# Altium PCB satFloat.PcbDoc
Units mil, origin at the board's own origin, x right, y up, seen from the top; angles counter-clockwise.
Board outline 2750 x 2255 mil, 4 copper layers (Top Layer, VCC, GND, Bottom Layer), stack 30.634 mil thick; 58 components, 45 nets, 251 pads, 54 vias.
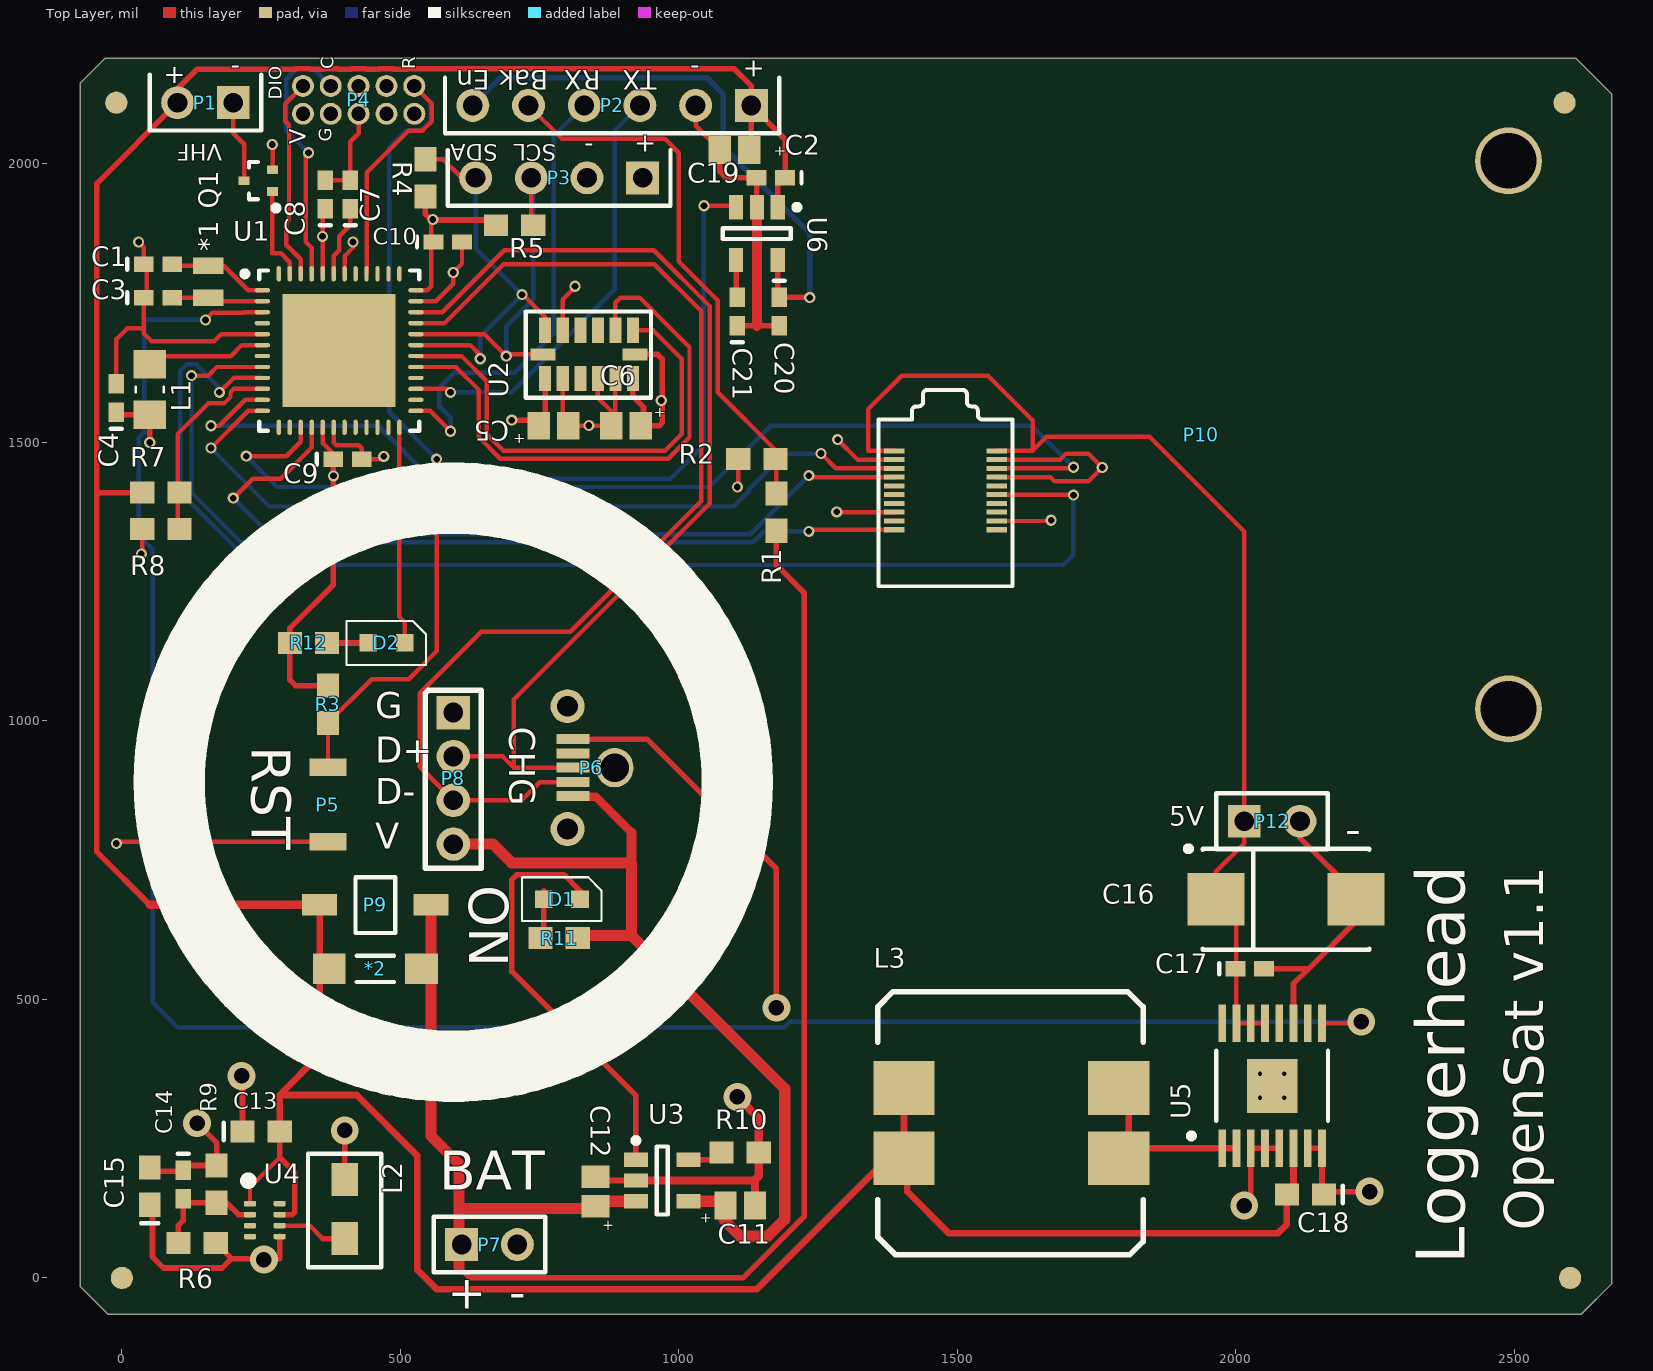
[diagram p0: Top Layer view]
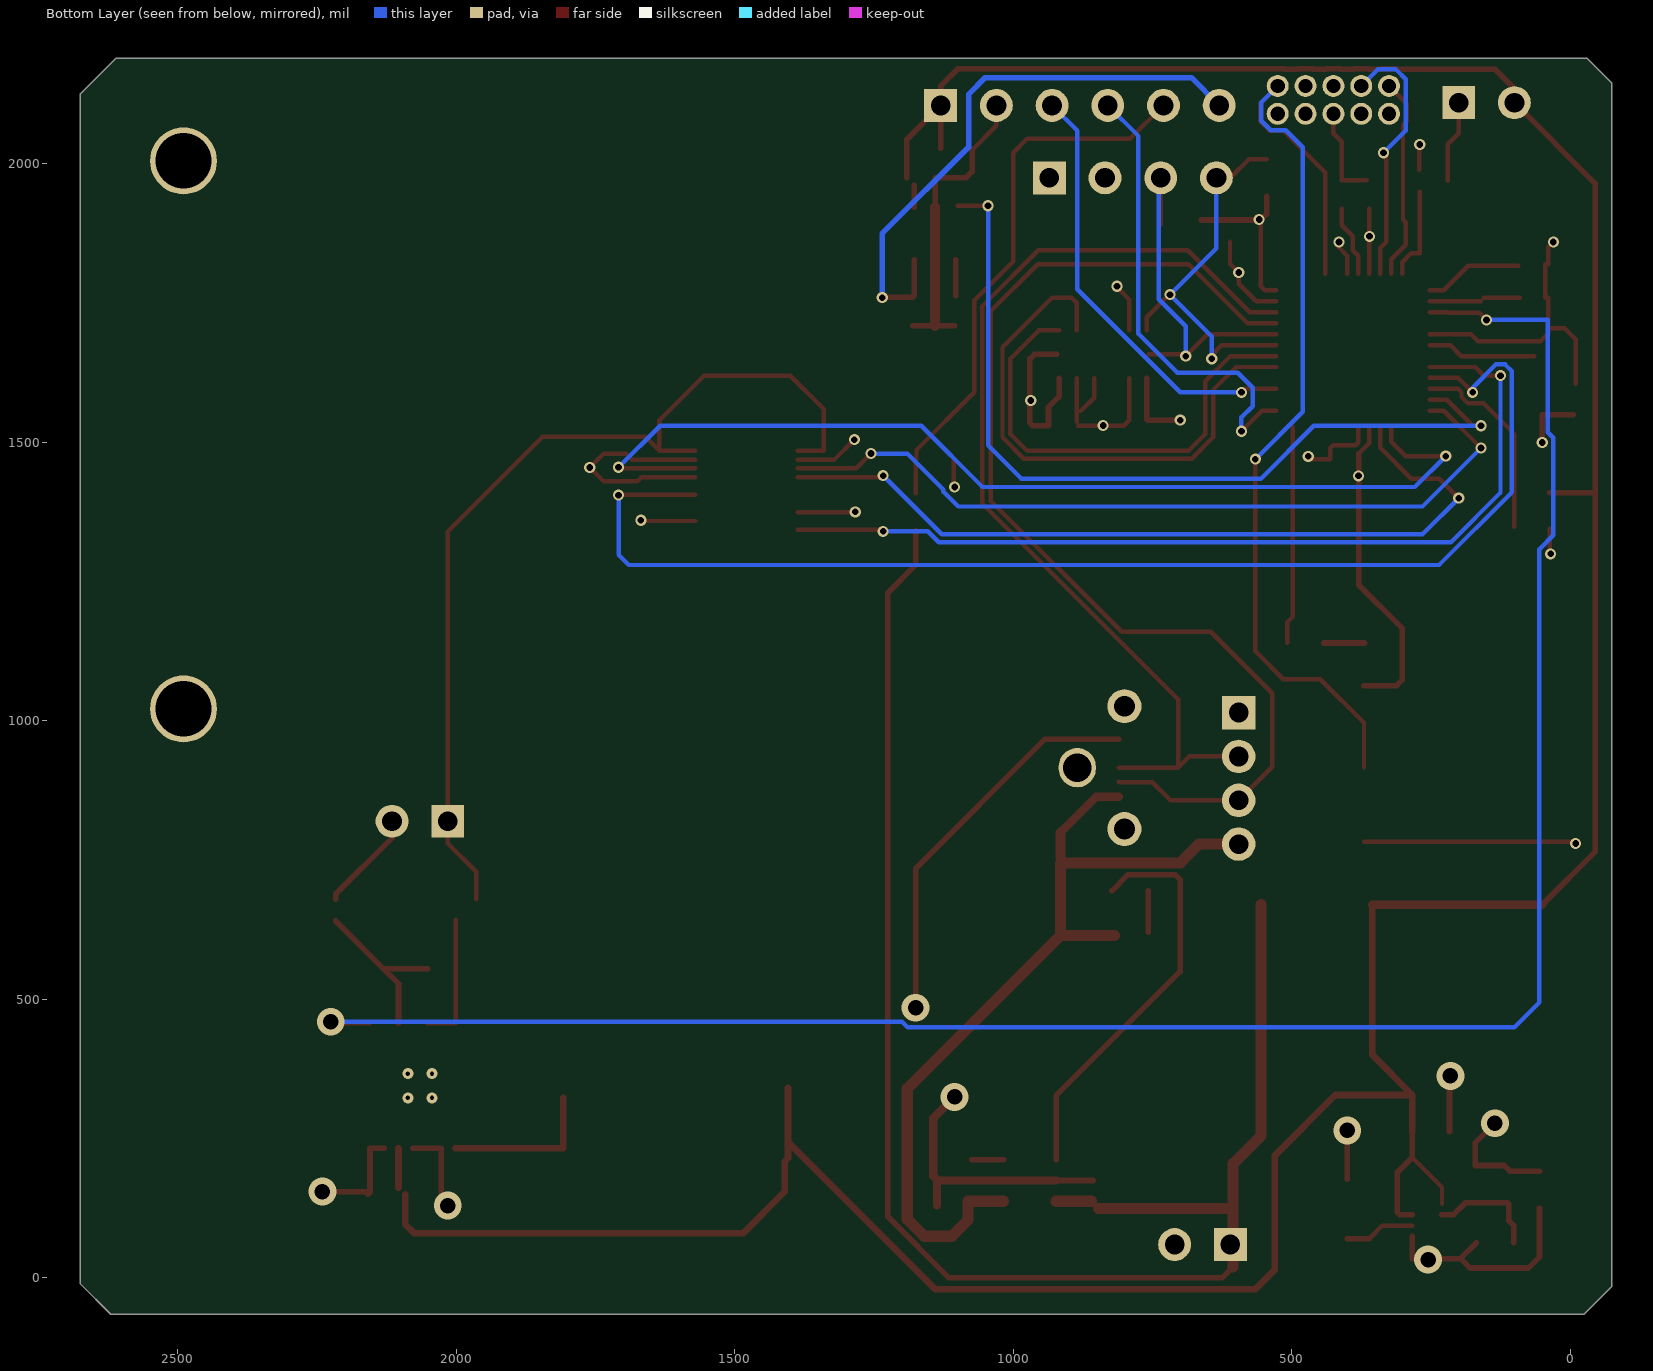
[diagram p1: Bottom Layer view, seen from below]
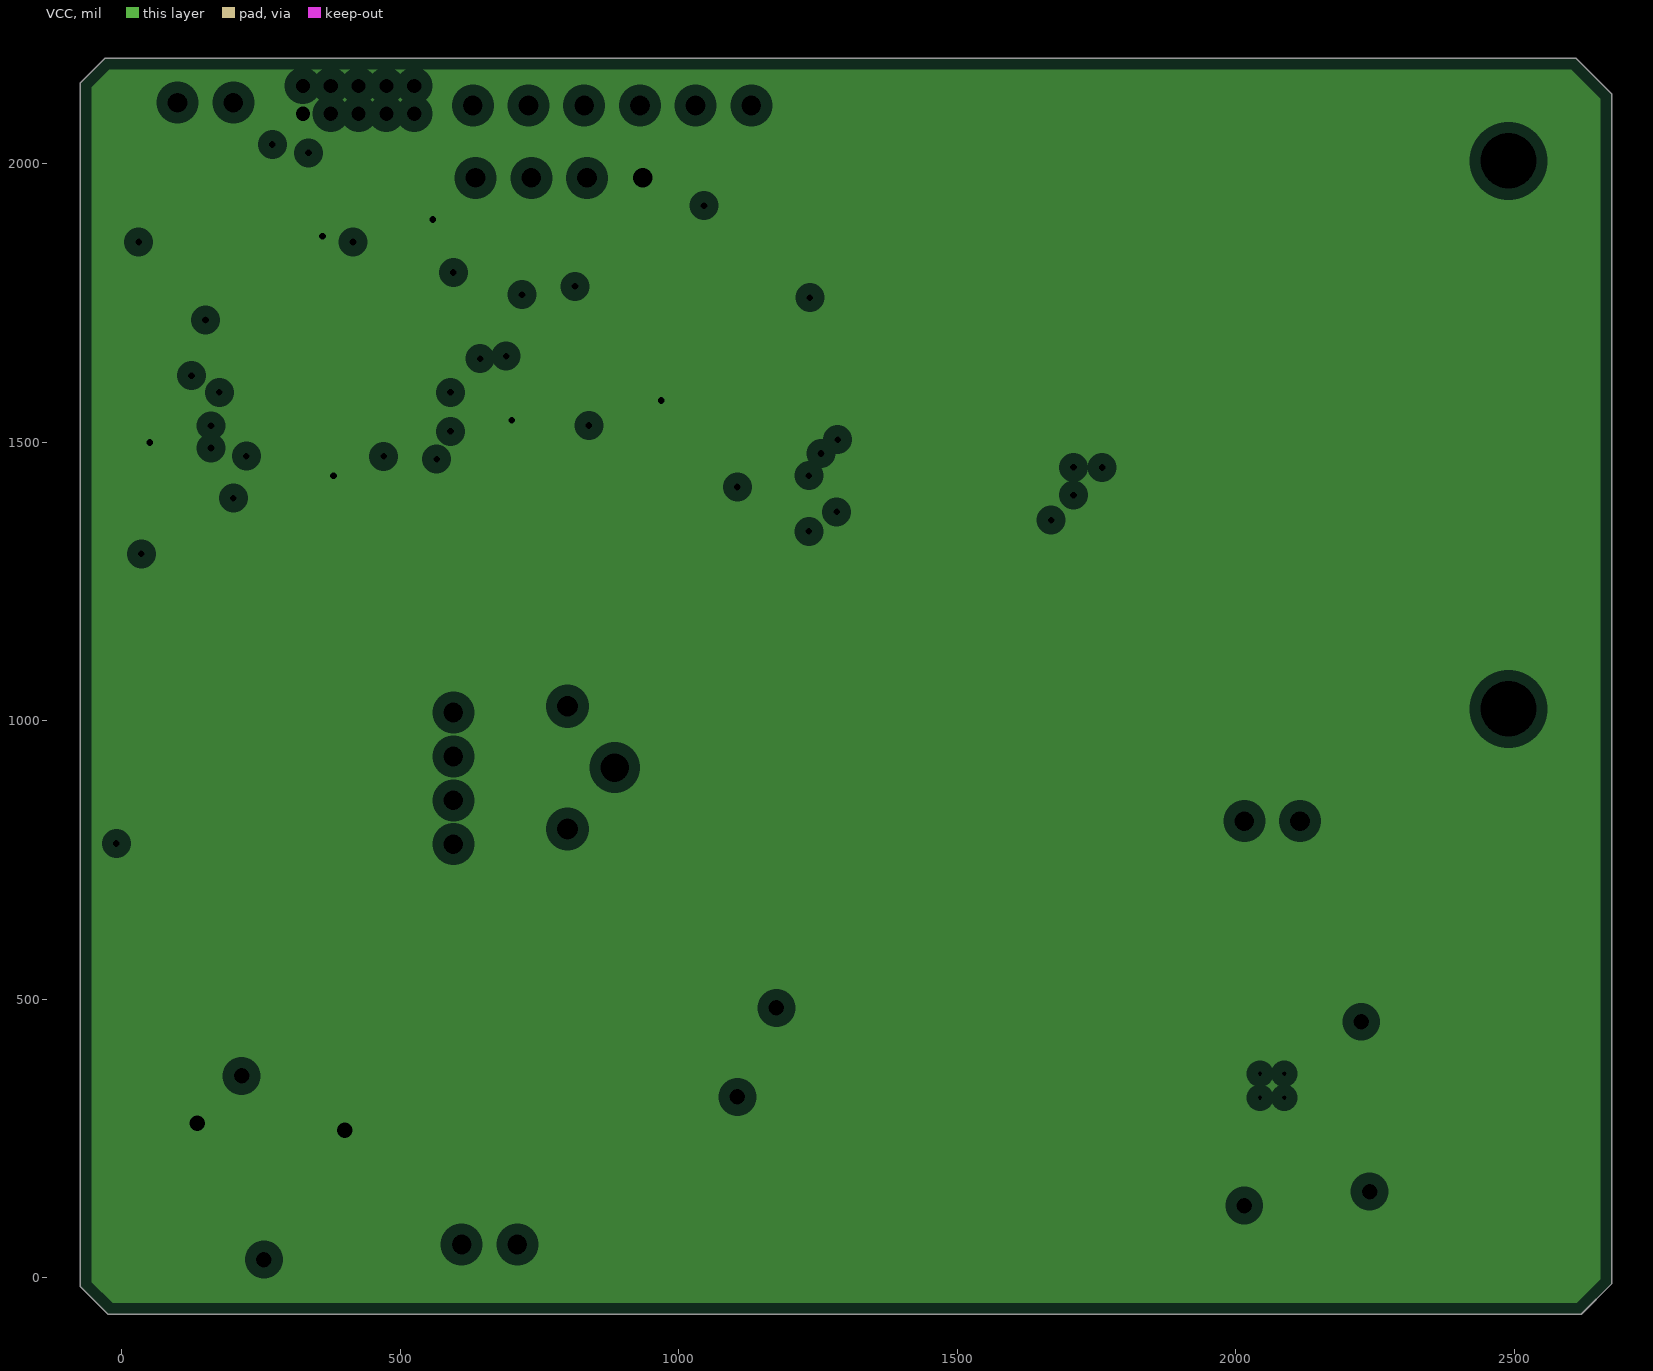
[diagram p2: VCC, clearances drawn from the general rule]
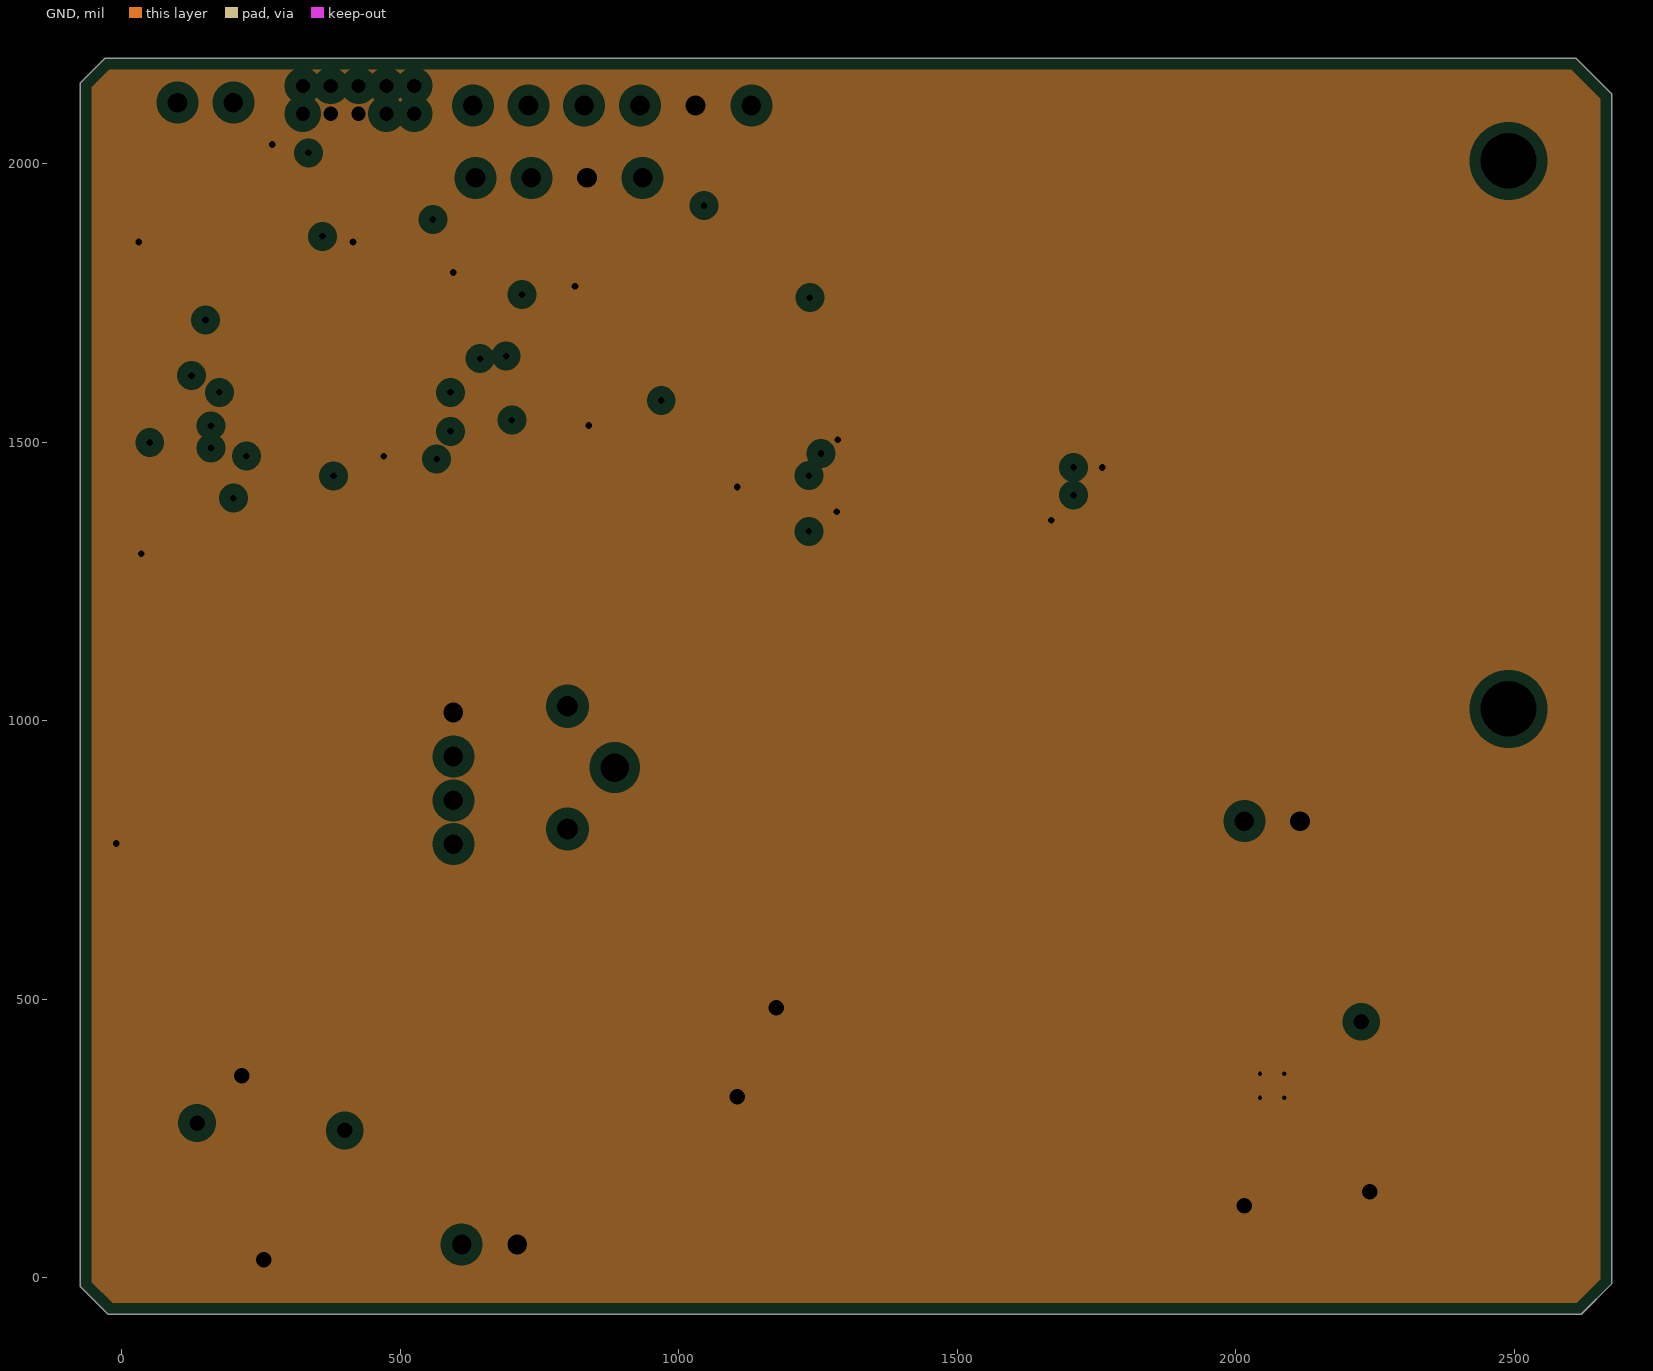
[diagram p3: GND, clearances drawn from the general rule]

## Layer stack, top to bottom
Top Solder: solder mask 0.4, Solder Resist, Dk 3.5
Top Layer: signal copper 1.4
Dielectric 1: core 10, FR-4, Dk 4.2
VCC: plane copper 1.417, net VCC
Dielectric 3: prepreg 5, Dk 4.2
GND: plane copper 1.417, net GND
Dielectric 2: core 10, Dk 4.2
Bottom Layer: signal copper 1.4
Bottom Solder: solder mask 0.4, Solder Resist, Dk 3.5

## Board outline
-75,-15 -75,2145 -30,2190 2610,2190 2675,2125 2675,-10 2620,-65 -25,-65

## Design rules (kind name [scope] priority, off if disabled: settings)
Clearance [All] p1: gap=6
PlaneClearance [All] p1: clearance=20
PlaneConnect [All] p1: planeconnectstyle=Relief reliefexpansion=20 reliefentries=4 reliefconductorwidth=10 reliefairgap=10
PolygonConnect [All] p1: connectstyle=Relief reliefconductorwidth=10 reliefentries=4 polygonreliefangle="90 Angle" airgapwidth=10
RoutingVias [All] p1: holewidth=20 width=50 viastyle="Through Hole" minholewidth=10 minwidth=20 maxholewidth=28 maxwidth=50
SolderMaskExpansion [All] p1: expansion=4
Width [All] p1: maxlimit=50 minlimit=6 preferedwidth=8
27 further rules are at their usual default settings.

## Classes and differential pairs
component class satFloat: *1 *2 C1 C2 C3 C4 C5 C6 C7 C8 C9 C10 C11 C12 C13 C14 C15 D1 D2 L1 L2 P1 P2 P3 P4 P5 P6 P7 P8 P9 Q1 R1 R2 R3 R4 R5 R6 R7 R8 R9 R10 R11 R12 U1 U2 U3 U4
component class iridium: C16 C17 C18 C19 C20 C21 L3 P10 P12 U5 U6

## Components (designator, comment, footprint, x,y, rotation, side; value= is the part's Value field where it differs from the comment)
*1 "XTAL_ABS06" XTAL-ABS06 155,1788.54 r90 top
*2 "Reed_MK24" "Reed MK24-B-3" 455,555 r180 top
C1 "22.5pF" 0402 65,1820 r0 top
C2 "1uF" Tant0805 1100,2025 r0 top
C3 "22.5pF" 0402 65,1760 r0 top
C4 "0.1uF" 0402 -10,1580 r90 top
C5 "1uF" Tant0805 775,1530 r180 top
C6 "1uF" Tant0805 905,1530 r0 top
C7 "0.1uF" 0402 410,1945 r90 top
C8 "0.1uF" 0402 365,1945 r90 top
C9 "0.1 uF" 0402 405,1470 r0 top
C10 "0.1 uF" 0402 585,1860 r0 top
C11 "1uF" Tant0805 1110,130 r180 top
C12 "1uF" Tant0805 850,155 r270 top
C13 "4.7uF" 0603 250,262.87 r0 top
C14 "82pF" 0402 110,167.87 r270 top
C15 "22uF" 0603 50,165 r90 top
C16 "T495X227K010ATE050" X 2090,680 r0 top
C17 "2.2uF" 0402 2025,555 r0 top
C18 "C0603" 0603 2125,150 r180 top
C19 "1.0uF" 0402 1165,1975 r180 top
C20 "1.0uF" 0402 1180,1735 r270 top
C21 "10nF" 0402 1105,1735 r90 top
D1 "LED_0603" Diode0603 790,680 r0 top
D2 "LED_0603" Diode0603 475,1140 r0 top
L1 "220Ohm" "0805 (M2125) Ferrite" 50,1595 r270 top
L2 "470nH" Inductor_470NH 400,70.59 r90 top
L3 "6.8uH" "Inductor - duplicate" 1790,215 r270 top
P1 "Header 2" HDR1X2 200,2110 r180 top
P2 "Header 6" HDR1X6 1130,2105 r180 top
P3 "Header 4" HDR1X4 935,1975 r180 top
P4 "Cortex Debug" Header_2x5_50mil 525,2090 r90 top
P5 "Tactile" Tactile-B3U-1000 370,850 r90 top
P6 "microUSB-vert" MICROUSB-VERT 810,865 r90 top
P7 "Battery" HDR1X2 610,60 r0 top
P8 "HDR_4x1_2mm" Hdr_4x1_2mm 595,1015 r180 top
P9 "DIP1" DIP1 555,670 r180 top
P10 "Iridiuim9603" Iridium9603 1480,1415 r270 top
P12 "UltraCap" HDR1X2 2015,820 r0 top
Q1 "DMN5L06TK-7" SOT-523 245,1970 r180 top
R1 "100l" 3-0603 1175,1375 r270 top
R2 "100k" 3-0603 1140,1470 r0 top
R3 "10K" 3-0603 370,1030 r270 top
R4 "4.7k" 3-0603 545,1975 r90 top
R5 "4.7k" 3-0603 705,1890 r180 top
R6 "150k" 3-0603 135,62.87 r0 top
R7 "100k" 3-0603 70,1410 r180 top
R8 "100k" 3-0603 70,1345 r0 top
R9 "680k" 3-0603 170,168.46 r270 top
R10 "2k" 3-0603 1110,225 r180 top
R11 "330X" 3-0603 785,610 r180 top
R12 "330X" 3-0603 335,1140 r0 top
U1 "ATSAMD21GA-MUT" QFN127P600-8N 390,1665 r0 top
U2 "ADXL343" ADXL345 760,1615 r90 top
U3 "MCP73831T-2DCI/OT" SOT-23-OT5_N 970,175 r0 top
U4 "TPS62822" TPS62822_SOP8 230,133.46 r0 top
U5 "TPS61032" TPS6103x 2065,345 r90 top
U6 "LP3985IM5-3.3" MF05A_N 1140,1875 r270 top

## Footprints (in the part's own frame and the unit in brackets; to place one, negate y for a bottom-side part, rotate by r counter-clockwise, add the part's x,y. Pads: shape width x height; smd on the part's side, far side on the other; paste and mask are expansions set on the pad)
3-0603 [mm] "Chip Resistor; Body 1.6 x 0.9 mm (LxW typ)"
  rect 1.1x1 smd: 1(-0.85,0) 2(0.85,0)
0402 [mm] "Chip Capacitor; Body 1.0 x 0.5 mm (LxW typ)"
  rect 0.9x0.7 smd: 1(-0.65,0) 2(0.65,0)
  silkscreen extent -1.4,-0.25 -1.4,0.25
0603 [mm] "Chip Capacitor; Body 1.6 x 0.8 mm (LxW typ)"
  rect 1.1x1 smd: 1(-0.85,0) 2(0.85,0)
  silkscreen extent -1.7,-0.4 -1.7,0.4
"0805 (M2125) Ferrite" [mm] "Chip Resistor; Body 2.0 x 1.3 mm (LxW typ)"
  rect 1.3x1.5 smd: 1(-1.15,0) 2(1.15,0)
  silkscreen extent -0.13,-0.64 0.13,0.64, body extent -1.15,-0.72 1.15,0.73, height 0.81
ADXL345 [mm] "Digital Accelerometer"
  rect 1.145x0.55 smd: 1(0,0) 2(0,-0.8) 3(0,-1.6) 4(0,-2.4) 5(0,-3.2) 6(0,-4) 8(2.195,-4) 9(2.195,-3.2) 10(2.195,-2.4) 11(2.195,-1.6) 12(2.195,-0.8) 13(2.195,0)
  rect 0.55x1.145 smd: 7(1.098,-4.098) 14(1.098,0.098)
  silkscreen extent -0.89,-4.83 3.05,0.89
Diode0603 [mm]
  rect 0.8x0.8 smd: A(-0.825,0) K(0.825,0)
  silkscreen extent -1.83,-1 1.8,1
DIP1 [mm]
  rect 1.6x1 smd: 1(0,0) 2(5.08,0)
  silkscreen extent 1.63,-1.25 3.45,1.29
HDR1X2 [mm] "Connector; Header; 2 Position"
  rect 1.5x1.5 hole 0.9: 1(0,0)
  round 1.5 hole 0.9: 2(2.54,0)
  silkscreen extent -1.27,-1.27 3.81,1.27
HDR1X4 [mm] "Connector; Header; 4 Position"
  rect 1.5x1.5 hole 0.9: 1(0,0)
  round 1.5 hole 0.9: 2(2.54,0) 3(5.08,0) 4(7.62,0)
  silkscreen extent -1.27,-1.27 8.89,1.27
HDR1X6 [mm] "Connector; Header; 6 Position"
  rect 1.5x1.5 hole 0.9: 1(0,0)
  round 1.5 hole 0.9: 2(2.54,0) 3(5.08,0) 4(7.62,0) 5(10.16,0) 6(12.7,0)
  silkscreen extent -1.27,-1.27 13.97,1.27
Hdr_4x1_2mm [mil]
  rect 60x60 hole 35.43: 1(0,0)
  round 60 hole 35.43: 2(0,78.74) 3(0,157.48) 4(0,236.22)
  silkscreen extent -50,-40 50,280
Header_2x5_50mil [mm]
  round 1 hole 0.65: 1(0,0) 2(1.27,0) 3(0,1.27) 4(1.27,1.27) 5(0,2.54) 6(1.27,2.54) 7(0,3.81) 8(1.27,3.81) 9(0,5.08) 10(1.27,5.08)
"Inductor - duplicate" [mm] "Sumida Inductor"
  rect 2.45x2.8 smd: 1(-3.2,0) 1(0,0) 2(-3.2,-9.8) 2(0,-9.8)
  silkscreen extent -7.6,-11 4.4,1.1
Inductor_470NH [mm] "Vishay IHLP1212AEERR47M11"
  rect 1.5x1.2 smd: 1(0,0) 2(2.7,0)
  silkscreen extent -1.3,-1.67 3.87,1.68
Iridium9603 [mm]
  round 3.048 hole 2.54: 0(-15,25.64) 0(9.99,25.64)
  rect 0.229x0.93 smd paste-0.02 mask+0.05: 1(-1.778,-2.37) 2(-1.778,2.3) 3(-1.378,-2.37) 4(-1.378,2.3) 5(-0.978,-2.37) 6(-0.978,2.3) 7(-0.578,-2.37) 8(-0.578,2.3) 9(-0.178,-2.37) 10(-0.178,2.3) 11(0.222,-2.37) 12(0.222,2.3) 13(0.622,-2.37) 14(0.622,2.3) 15(1.022,-2.37) 16(1.022,2.3) 17(1.422,-2.37) 18(1.422,2.3) 19(1.822,-2.37) 20(1.822,2.3)
  silkscreen extent -4.56,-3.09 4.4,3.02, body extent -3.98,-2.5 3.56,2.5, height 3.38
MF05A_N [mm] "SOT23, 5-Leads, Body 2.9x1.6mm, Pitch 0.95mm, Lead Span 2.8mm, IPC Medium Density"
  rect 1.1x0.65 smd: 1(-1.2,0.95) 2(-1.2,0) 3(-1.2,-0.95) 4(1.2,-0.95) 5(1.2,0.95)
  silkscreen extent -1.32,-1.55 0.25,1.95, body extent -0.9,-1.55 0.9,1.55, height 1.19
MICROUSB-VERT [mm] "Molex 05133-0011"
  rect 0.45x1.5 smd: 1(0,0) 2(0.65,0) 3(1.3,0) 4(1.95,0) 5(2.6,0)
  round 1.55 hole 0.95: ""(-1.5,0.25) ""(4.1,0.25)
  oval 1.8x1.7 hole 1.3: ""(1.3,-1.9)
  body extent -2.67,-3.05 5.35,1.4, height 7.53
QFN127P600-8N [mm]
  oval 0.7x0.2 smd: 1(-3.5,2.75) 2(-3.5,2.25) 3(-3.5,1.75) 4(-3.5,1.25) 5(-3.5,0.75) 6(-3.5,0.25) 7(-3.5,-0.25) 8(-3.5,-0.75) 9(-3.5,-1.25) 10(-3.5,-1.75) 11(-3.5,-2.25) 12(-3.5,-2.75) 25(3.5,-2.75) 26(3.5,-2.25) 27(3.5,-1.75) 28(3.5,-1.25) 29(3.5,-0.75) 30(3.5,-0.25) 31(3.5,0.25) 32(3.5,0.75) 33(3.5,1.25) 34(3.5,1.75) 35(3.5,2.25) 36(3.5,2.75)
  oval 0.2x0.7 smd: 13(-2.75,-3.5) 14(-2.25,-3.5) 15(-1.75,-3.5) 16(-1.25,-3.5) 17(-0.75,-3.5) 18(-0.25,-3.5) 19(0.25,-3.5) 20(0.75,-3.5) 21(1.25,-3.5) 22(1.75,-3.5) 23(2.25,-3.5) 24(2.75,-3.5) 37(2.75,3.5) 38(2.25,3.5) 39(1.75,3.5) 40(1.25,3.5) 41(0.75,3.5) 42(0.25,3.5) 43(-0.25,3.5) 44(-0.75,3.5) 45(-1.25,3.5) 46(-1.75,3.5) 47(-2.25,3.5) 48(-2.75,3.5)
  rect 5.15x5.15 smd paste-1.27: 49(0,0)
  silkscreen extent -4.42,-3.65 3.65,3.65, body extent -3.5,-3.5 3.5,3.5, height 0.85
"Reed MK24-B-3" [mm] "Meder Reed Switch Surface Mount"
  rect 1.5x1.4 smd: 1(-2.1,0) 2(2.1,0)
  silkscreen extent -0.85,-0.6 0.85,0.6, body extent -2.75,-1.1 2.75,1.1, height 1.8
SOT-23-OT5_N [mm] "SOT23, 5-Leads, Body 2.9x1.7mm, Pitch 0.95mm, Lead Span 2.8mm, IPC Medium Density"
  rect 1.1x0.65 smd: 1(-1.2,0.95) 2(-1.2,0) 3(-1.2,-0.95) 4(1.2,-0.95) 5(1.2,0.95)
  silkscreen extent -1.32,-1.55 0.25,1.95, body extent -0.9,-1.55 0.9,1.55, height 1.45
SOT-523 [mm] "For Diodes Inc MOSFET DMN5L06TK"
  rect 0.51x0.4 smd: 1(-0.65,0.5) 2(-0.65,-0.5) 3(0.65,0)
  silkscreen extent -0.93,-0.85 0.42,1.37, body extent -0.43,-0.85 0.42,0.85, height 0.8
Tactile-B3U-1000 [mm]
  rect 0.8x1.7 smd: 1(-1.7,0) 2(1.7,0)
Tant0805 [mil]
  rect 40x50 smd: 1(-26.5,0) 2(26.5,0)
TPS6103x [mm] "TSOP, 16-Leads, Body 5.00x4.40mm, Pitch 0.65mm, Thermal Pad 2.31.2x2.46.2mm, IPC Medium Density"
  rect 1.7x0.35 smd: 1(-2.85,2.275) 2(-2.85,1.625) 3(-2.85,0.975) 4(-2.85,0.325) 5(-2.85,-0.325) 6(-2.85,-0.975) 7(-2.85,-1.625) 8(-2.85,-2.275) 9(2.85,-2.275) 10(2.85,-1.625) 11(2.85,-0.975) 12(2.85,-0.325) 13(2.85,0.325) 14(2.85,0.975) 15(2.85,1.625) 16(2.85,2.275)
  rect 2.46x2.31 smd: 17(0,0)
  silkscreen extent -2.41,-2.55 1.6,3.81, body extent -2.25,-2.55 2.25,2.55, height 1.2
TPS62822_SOP8 [mm]
  rrect50% 0.55x0.25 smd: 1(0,0) 2(0,-0.5) 3(0,-1) 4(0,-1.5) 5(1.35,-1.5) 6(1.35,-1) 7(1.35,-0.5) 8(1.35,0)
  silkscreen extent -0.2,0.93 0.05,1.17
X [mm] "Capacitor, SM Tantalum; Body 7.3 x 4.3 mm (LxW typ)"
  rect 2.6x2.4 smd: 1(-3.2,0) 2(3.2,0)
  silkscreen extent -4.57,-2.3 3.8,2.42
XTAL-ABS06 [mm]
  rect 0.75x1.4 smd: 1(-0.725,0) 2(0.725,0)

## Part data
C1 C3 C4 C7 C8 C9 C10 C14 C17 C19 C20 C21: library part C0402, "Ceramic Chip Capacitor - Standard"
C2 C5 C6 C11 C12: library part Tant0805
C13 C15: library part C0603, "Ceramic Chip Capacitor - Standard"
C16: library part T495X, "Solid Tantalum Chip Capacitor, Standard T495 Series - Low ESR, Surge Robust"
C18: "Ceramic Chip Capacitor - Standard"
L1: library part "Ferrite 0805(M2125) 3A", "Ferrite 25mOhm@DC,  60 Ohm@100MHz"
L2: library part Inductor_470NH
L3: library part "Inductor 6.8uH", "Sumida Inductor"
P1: "Header, 2-Pin"
P2: "Header, 6-Pin"
P3: "Header, 4-Pin"
P4: library part CortexDebug
P5: library part Tactile_B3U-1000
P6: "Molex 105133-0011"
P7 P12: library part "Header 2", "Header, 2-Pin"
P10: library part IRIDIUM9603
Q1: library part "FET DMN5L06TK-7", "Ultra-low leakage Enhanced MOSFET"
R1 R2 R3 R4 R5 R6 R7 R8 R9 R10 R11 R12: library part ERJ3RK, "Precision Thick Film Chip Resistor, 10 Ohm to 1M Ohm Range, 1% and 0.5% Tolerance, 0603 Size, 0.063 W"
U1: library part ATSAMD21G18
U2: library part ADXL345
U3: "Miniature Single-Cell, Fully Integrated Li-Ion, Li-Polymer Charge Management Controller, 4.2V, 5-Pin SOT-23, Industrial Temperature, Tape and Reel"
U4: "Step-down converter"
U5: library part TPS6103x, "Boost converter"
U6: "Micropower, 150mA Low-Noise Ultra Low-Dropout CMOS Voltage Regulator"

## Free pads (board coordinates)
  round 40 smd paste-20 mask+5: 0(-10,2110) 0(0,0) 0(2590,2110) 0(2600,0)

## Via types
v1: diameter 20, hole 12, Top Layer to Bottom Layer, 41 vias
v2: diameter 50, hole 28, Top Layer to Bottom Layer, 9 vias
v3: diameter 19.68, hole 7.87, Top Layer to Bottom Layer, 4 vias

## Nets (pads, with @x,y where several pads share a name; then routed paths per layer and width w, separated by ;. In a path a pad name is that pad's centre, name@x,y a point inside that pad or via, vN(x,y) a via of type N, cw(c..) or ccw(c..) an arc to the next point about the centre after c; other vN are vias at no path point)
5V_ENABLE: U1.3 U5.9 | length 3717.9
  Top Layer w8: v1(150,1720) 163.24,1733.24 218.24,1733.24 218.9,1733.9 U1.3 ; U5.9 v2@2222.2,457.2
  Bottom Layer w8: v1(150,1720) 40,1720 40,1518.28 30,1508.28 30,1333.28 55,1308.28 55,495 100,450 1189.5,450 1199.5,460 v2(2225,460)
A4: R7.1 R8.2 U1.10 | length 357.3
  Top Layer w8: R8.2@100,1348.46 100,1515 155,1570 183.28,1570 195,1581.72 195,1590.2 200.9,1596.1 U1.10
AINT1: U1.30 U2.8 | length 859.6
  Top Layer w8: U1.30 609.84,1655.16 655,1610 655,1515 685,1485 975,1485 1005,1515 1005,1650 953.58,1701.42 U2.8
AINT2: U1.29 U2.9 | length 1009.8
  Top Layer w8: U1.29 599.53,1635.47 641,1594 641,1509.2 679.2,1471 980.8,1471 1019,1509.2 1019,1671 930,1760 895,1760 885.98,1750.98 U2.9
D+: P6.3 P8.2 U1.34 | length 1812.2
  Top Layer w8: U1.34 575.13,1733.9 686.23,1845 955,1845 1055,1745 1055,1390 703.82,1038.82 703.82,916.18 ; P8.2 683.74,936.26 703.82,916.18 ; P6.3 703.82,916.18
D-: P6.2 P8.3 U1.33 | length 2025.9
  Top Layer w8: U1.33 579.21,1714.21 685,1820 956,1820 1040,1736 1040,1394.8 805.2,1160 645,1160 535,1050 535,917.52 P8.3 717.52,857.52 750,890 809.41,890 P6.2
DF_RI: P10.12 U1.9 | length 2316.5
  Top Layer w8: v1(175,1590) 200.79,1615.79 U1.9 ; P10.12 v1@1708.74,1406.26
  Bottom Layer w8: v1(175,1590) 175,1598.28 133.28,1640 116.72,1640 105,1628.28 105,1410.2 235.2,1280 1690,1280 1708.32,1298.32 v1(1708.32,1405.38)
DF_RX: P10.7 U1.16 | length 1473.2
  Top Layer w8: v1(200,1400) 235,1435 285,1435 340.79,1490.79 U1.16 ; v1@1232.24,1437.76 P10.7
  Bottom Layer w8: v1(200,1400) 265,1335 1127.94,1335 v1(1233.32,1440.38)
DF_TX: P10.6 U1.15 | length 1855.4
  Top Layer w8: v1@225,1475 295,1475 321.1,1501.1 U1.15 ; P10.6 v1@1708.5,1453.5
  Bottom Layer w8: v1(223.32,1475.38) 278.7,1420 1055,1420 1165,1530 1633.7,1530 v1(1708.32,1455.38)
GND: C1.1 C2.1 C3.1 C4.2 C5.1 C6.1 C7.2 C8.2 C9.2 C10.2 C11.1 C12.1 C13.1 C15.1 C16.2 C17.2 C18.1 C19.2 C20.2 C21.1 P2.2 P3.2 P4.5 P4.7 P5.1 P6.5 P7.2 P8.1 P10.3 P10.4 P10.8 P10.15 P10.18 P12.2 Q1.2 R2.1 R6.2 R8.1 R10.1 U1.5 U1.18 U1.35 U1.42 U2.2 U2.4 U2.5 U2.12 U3.2 U4.5 U5.3 U5.4 U5.5 U5.7 U5.8 U5.11 U5.17 U6.2 | length 5800.9
  Top Layer w8: C4.2 -10,1685 10,1705 39.41,1705 ; v1@-5,780 -1.93,783.07 P5.1 ; v1(30,1860) 39.41,1850.59 C1.1 ; v1@36.54,1301.54 R8.1 ; C3.1 39.41,1705 ; C3.1@44.41,1760 C1.1@44.41,1820 ; U1.5 178.27,1694.53 165.74,1682 53,1682 39.41,1695.59 39.41,1705 ; Q1.2 v1@270.59,2034.41 ; C8.2 C7.2 410,2040 425,2055 P4.5 ; U1.18 380.16,1499.84 385,1495 425,1495 430.59,1489.41 C9.2 v1@465,1470 ; U1.42 399.84,1834.84 415,1850 v1(415,1860) ; U1.35 563.58,1753.58 595,1785 v1(595,1805) 610.59,1820.59 C10.2 ; U2.2 791.5,1540 C5.1 C6.1 C6.1@883.5,1530 ; U2.12 791.5,1756.5 v1@815,1780 ; U2.4 854.49,1580.51 878.5,1556.5 ; C6.1@885.98,1537.48 U2.5 ; P2.2 1030,2068.5 C2.1 ; v1@1106.54,1423.46 R2.1 ; v1@1284.76,1374.76 P10.15 ; v1(1285,1505) 1320.75,1469.25 P10.3 ; P10.18 v1@1670.98,1359.02 ; P10.8 1667.24,1437.76 1675,1430 1735,1430 v1(1760,1455) 1735,1480 1695,1480 1684.25,1469.25 P10.4
  Top Layer w10: C15.1@55,125 55,37.87 75,17.87 179.76,17.87 196.61,34.72 ; R6.2 196.61,34.72 ; C13.1 v2@216.54,361.34 ; U4.5 283.15,34.72 196.61,34.72 ; P6.5 942.36,967.36 1175,734.72 v2(1175,485) ; C12.1@856.5,175 U3.2 ; C2.1 1073.5,1986.5 1085,1975 C19.2 1140,1974.41 U6.2 ; C21.1 1140,1709.41 ; 1135,175 1136.5,176.5 ; 1140.59,1709.41 C20.2 ; v2@2010,130 2026.61,146.61 U5.3 U5.4 U5.5 ; C17.2 2130,555 ; U5.11 2103.39,528.39 2130,555 ; P12.2 2115,790 2215.98,689.02 C16.2 ; U5.7 U5.8 2154.57,153.9 C18.1 2163.46,155 v2@2230,155 ; C16.2@2215.98,640.98 2130,555
  Top Layer w15: U3.2 1135,175 ; v2(1105,325) 1143.46,286.54 R10.1 1143.46,183.46 1136.5,176.5 C11.1
  Top Layer w18: 1140,1709.41 U6.2
  other v1: -10,780 35,1300 1668.32,1360.38 1283.32,1375.38 1105,1420 470,1475 838.32,1530.38 813.32,1780.38 270,2035
  other v2: 255,32.87 2015,130 2240,155 215,362.87
  other v3: 2043.35,323.35 2086.65,323.35 2043.35,366.65 2086.65,366.65
GPSBAT: P2.5 R1.1 R2.2 | length 987.1
  Top Layer w8: P2.5 790,2045 975,2045 1000,2020 1000,1825 1070,1755 1070,1590 1173.46,1486.54 R2.2 ; R1.1 R2.2@1175,1468.46
GPSEN: U1.11 U6.3 | length 1545.5
  Top Layer w8: v1(160,1530) 175,1530 221.42,1576.42 U1.11 ; v1(1045,1925) U6.3@1099.84,1925
  Bottom Layer w8: v1(160,1530) 460,1530 555,1435 985,1435 1045,1495 v1(1045,1925)
GPSPOW: C20.1 P2.6 U6.5 | length 1031.3
  Top Layer w10: C20.1@1177.4,1763.19 U6.5 ; C20.1 v1@1234.41,1760.59
  Bottom Layer w10: P2.6 680,2155 1050,2155 1080,2125 1080,2030 1235,1875 v1(1235,1760)
IAVAIL: P10.19 U1.8 | length 1646.8
  Top Layer w8: v1(125,1620) 155,1620 170.47,1635.47 U1.8 ; v1@1236.73,1343.27 P10.19
  Bottom Layer w8: v1(125,1620) 125,1410 214,1321 1133.74,1321 1153.12,1340.38 v1(1233.32,1340.38)
IONOFF: P10.5 U1.12 | length 1442.3
  Top Layer w8: v1(160,1490) 226.73,1556.73 U1.12 ; v1(1255,1480) 1281.5,1453.5 P10.5
  Bottom Layer w8: v1(160,1490) 265,1385 1098.28,1385 1125,1411.72 1125,1415 1190,1480 v1(1255,1480)
LED1: D2.K U1.24 | length 391
  Top Layer w8: U1.24 498.27,1186.73 507.48,1177.52 D2.K
MISO: U1.21
MOSI: U1.19
Net*1_1: *1.1 C3.2 U1.2 | length 156.6
  Top Layer w8: C3.2 *1.1 ; *1.1@160,1753.58 U1.2
Net*1_2: *1.2 C1.2 U1.1 | length 176.9
  Top Layer w8: C1.2@93.5,1817.09 *1.2 182.91,1817.09 226.73,1773.27 U1.1
NetC7_1: C7.1 U1.43 | length 129
  Top Layer w8: U1.43 380.16,1835.16 390,1845 390,1870 410,1890 C7.1
NetC14_2: C14.2 R6.1 R9.2 U4.2 | length 203.2
  Top Layer w10: R6.1 101.54,94.41 110,102.87 110,132.87 112.13,135 R9.2 187.87,135 209.09,113.78 U4.2
NetC21_2: C21.2 U6.4 | length 64.8
  Top Layer w10: C21.2@1102.6,1762.99 U6.4
NetD1_A: D1.A R11.2 | length 74
  Top Layer w10: R11.2@757.52,620.98 D1.A@757.52,695
NetD1_K: D1.K U3.1 | length 733.1
  Top Layer w10: D1.K@822.48,695 793.48,724 709,724 700,715 700,550 922.76,327.24 U3.1
NetD2_A: D2.A R12.2 | length 74.1
  Top Layer w10: R12.2 D2.A
NetL1_1: L1.1 U1.6 | length 195.7
  Top Layer w8: L1.1@64.72,1655 195.32,1655 215.16,1674.84 U1.6
NetL2_1: L2.1 U4.6 | length 126.6
  Top Layer w8: U4.6 337.09,94.09 360.59,70.59
  Top Layer w10: 360.59,70.59 L2.1
NetL3_1: L3.1 U5.1 U5.2 | length 283.6
  Top Layer w12: L3.1@1807.8,323.19 1807.8,232.8 U5.1 U5.2
NetR10_2: R10.2 U3.5 | length 56.7
  Top Layer w10: U3.5 R10.2@1073.94,212.4
RESET: P4.2 P5.2 R3.2 U1.40 | length 1850.6
  Top Layer w8: P5.2 R3.2 448.46,1075 515,1075 565,1125 v1(565,1470) ; U1.40 439.21,1984.21 515,2060 539.81,2060 556.69,2076.88 556.69,2108.31 P4.2
  Bottom Layer w8: P4.2 554.69,2110.31 554.69,2077.7 537.3,2060.31 510.31,2060.31 480,2030 480,1555 v1(565,1470)
RXD2: P2.4 U1.25 | length 841.8
  Top Layer w8: U1.25 553.27,1556.73 v1(590,1520)
  Bottom Layer w8: v1(590,1520) 590,1545 570,1565 570,1598.28 596.72,1625 705,1625 775,1695 775,2050 P2.4
SCK: U1.20
SCL: P3.3 R5.1 U1.32 U2.14 | length 665.7
  Top Layer w8: U1.32 650.47,1694.53 686.79,1658.21 U2.14 ; P3.3 735,1891.54 R5.1@736.54,1890
  Bottom Layer w8: v1(690,1655) 690,1708.77 738.32,1757.1 P3.3@738.32,1971.68
SDA: P3.4 R4.2 U1.31 U2.13 | length 699.6
  Top Layer w8: U1.31 625.16,1674.84 v1@645,1655 ; R4.2 576.54,2008.46 610,1975 P3.4 ; v1@720,1765 760,1725 U2.13
  Bottom Layer w8: P3.4 635,1848.7 v1(718.32,1765.38) 643.32,1690.38 v1(643.32,1650.38)
SWCLK: P4.8 U1.45 | length 471.9
  Top Layer w8: v1(335,2020) 330,2015 330,1860 340.79,1849.21 U1.45
  Bottom Layer w8: v1(335,2020) 295,2060 295,2151.98 312.7,2169.69 345.31,2169.69 P4.8
SWDIO: P4.10 U1.46 | length 366
  Top Layer w8: U1.46 321.1,1828.9 295,1855 295,1895 300,1900 300,2070.19 293.31,2076.88 293.31,2108.31 P4.10
TXD2: P2.3 U1.27 | length 785
  Top Layer w8: U1.27 583.9,1596.1 v1(590,1590)
  Bottom Layer w8: v1(590,1590) 700,1590 885,1775 885,2060 P2.3
V_BATT: *2.1 C12.2 P7.1 P9.1 R1.2 U3.3 | length 2902
  Top Layer w10: 605,20 625,0 1115,0 1225,110 1225,1230 1175,1280 R1.2
  Top Layer w20: P9.1 555,255 605,205 605,125 ; 605,20 605,125 ; C12.2@846.5,125 605,125 ; C12.2@859.1,137.6 U3.3
VBUS: C11.2 P6.1 P8.4 R11.1 U3.4 | length 1591.7
  Top Layer w15: P6.1@810,863.73 851.27,863.73 915,800
  Top Layer w18: 915,755 915,800
  Top Layer w20: P8.4 666.22,778.78 700,745 915,745 915,615 ; R11.1@818.46,615 915,615 ; U3.4 1081.1,137.6 1081.1,103.9 1110,75 1160,75 1190,105 1190,340 915,615
VCC: C4.1 C5.2 C6.2 C8.1 C9.1 C10.1 C14.1 C15.2 L1.2 L2.2 P3.1 P4.9 R3.1 R4.1 R5.2 R9.1 R12.1 U1.17 U1.36 U1.44 U2.1 U2.6 U2.7 | length 1818.1
  Top Layer w8: U1.17 360.47,1498.94 C9.1@379.41,1480 ; U1.44 C8.1@360.47,1919.41 ; U1.36 548.27,1773.27 555.59,1780.59 v1@555.59,1899.41
  Top Layer w10: C4.1@-5.31,1549.72 L1.2 v1(50,1500) ; C15.2@55,191.93 108.46,191.93 C14.1 118.46,201.93 R9.1 170,242.87 v2(135,277.87) ; R3.1 311.54,1063.46 301.54,1073.46 R12.1 301.54,1166.54 379.41,1244.41 C9.1@379.41,1480 ; L2.2 v2(400,265) ; R4.1 545,1910 555.59,1899.41 R5.2@662.13,1899.41 ; v1(700,1540) 758.5,1540 760,1541.5 U2.1 ; U2.6 917.48,1582.52 936.5,1563.5 936.5,1530 965,1530 970,1535 970,1650 961.79,1658.21 U2.7
  other v1: 380,1440 968.32,1575.38 360,1870 558.32,1900.38
VCC5: C16.1 C17.1 P10.1 P10.2 P12.1 U5.13 U5.14 U5.15 | length 1973
  Top Layer w8: P10.1 1340,1485 1340,1560 1400,1620 1555,1620 1635,1540 1635,1485 ; P10.2 1635,1485 ; C16.1 1964.02,729.02 2015,780 P12.1 2015,1340 1845,1510 1660,1510 1635,1485 ; C16.1@2001.02,642.99 U5.15 U5.14 U5.13
VHF: Q1.1 U1.47 | length 169.3
  Top Layer w8: Q1.1@270,1950.32 270,1840 285,1840 301.42,1823.58 U1.47
VHF_GND: P1.1 Q1.3 | length 148
  Top Layer w8: P1.1 200,2055 219.41,2035.59 Q1.3
VIN: *2.2 C2.2 C13.2 C18.2 C19.1 L3.2 P1.2 P2.1 P9.2 R7.2 U4.1 U4.7 U5.6 U6.1 | length 6570
  Top Layer w8: U4.1 230,162.87 283.46,216.34
  Top Layer w10: R7.2 -45,1410 ; 50,670 -45,765 -45,1410 ; U4.7 305.91,113.78 310,117.87 310,189.8 283.46,216.34 C13.2 ; C2.2@1130,2028.5 P2.1 ; U6.1 C19.1@1177.4,1961.81 ; C19.1 1190.59,2044.41 P2.1 ; -45,1410 -45,1965 P1.2 100,2135 135,2170 311.6,2170 312.29,2170.69 337.71,2170.69 338.4,2170 361.6,2170 362.29,2170.69 387.71,2170.69 388.4,2170 411.6,2170 412.29,2170.69 437.71,2170.69 438.4,2170 461.6,2170 462.29,2170.69 487.71,2170.69 488.4,2170 511.6,2170 512.29,2170.69 1099.31,2170.69 1130,2140 P2.1
  Top Layer w12: C13.2 283.46,328.46 ; P9.2 355,400 283.46,328.46 ; L3.2@1404.17,340.98 L3.2@1404.17,244.17 ; C18.2 2091.54,96.54 2075,80 1485,80 1410,155 1410,209.17 1404.17,215 L3.2@1404.17,244.17 ; C18.2@2103.39,161.85 U5.6 ; 283.46,328.46 421.54,328.46 530,220 530,15 565,-20 1140,-20 L3.2@1404.17,244.17
  Top Layer w15: 50,670 P9.2
pads on no net: P4.1 P4.3 P4.4 P4.6 P6. P6.4 P10.0 P10.9 P10.10 P10.11 P10.13 P10.14 P10.16 P10.17 P10.20 U1.4 U1.7 U1.13 U1.14 U1.22 U1.23 U1.26 U1.28 U1.37 U1.38 U1.39 U1.41 U1.48 U1.49 U2.3 U2.10 U2.11 U4.3 U4.4 U4.8 U5.10 U5.12 U5.16

## Polygon pours and split planes (outlines as drawn)
VCC on VCC (split plane): 2654.9,2116.68 2654.9,-1.68 2611.68,-44.9 -16.68,-44.9 -54.9,-6.68 -54.9,2136.68 -21.68,2169.9 2601.68,2169.9
GND on GND (split plane): 2654.9,2116.68 2654.9,-1.68 2611.68,-44.9 -16.68,-44.9 -54.9,-6.68 -54.9,2136.68 -21.68,2169.9 2601.68,2169.9

## Silkscreen, mask and mechanical layers (free items; w line width, h text height)
Top Overlay:
  circle w128: c595,890 r510
  text "+" at 115,2185 h60 r180
  text "En" at 660,2180 h60 r180
  text "Bak" at 765,2180 h60 r180
  text "RX" at 860,2180 h60 r180
  text "TX" at 960,2180 h60 r180
  text "C" at 388.4,2170 h40 r90
  text "R" at 535,2170 h40 r90
  text "-" at 195,2150 h60
  text "-" at 1020,2150 h60
  text "+" at 1115,2145 h60
  text "DIO" at 295,2115 h40 r90
  text "VHF" at 180,2045 h50 r180
  text "SDA" at 675,2045 h50 r180
  text "SCL" at 780,2045 h50 r180
  text "G" at 385,2040 h40 r90
  text "V" at 340,2035 h50 r90
  text "-" at 830,2010 h60
  text "+" at 920,2010 h60
  text "G" at 455,990 h80
  text "CHG" at 680,990 h80 r270
  text "RST" at 210,955 h120 r270
  text "D+" at 455,910 h80
  text "-" at 2225,840 h100 r180
  text "D-" at 455,835 h80
  text "5V" at 1880,800 h60
  text "V" at 455,755 h80
  text "ON" at 600,705 h120 r270
  text "BAT" at 570,135 h120
  text "OpenSat v1.1" at 2575,85 h120 r90
  text "Loggerhead" at 2440,25 h150 r90
  text "+" at 585,-55 h60
  text "-" at 695,-55 h60
Mechanical 1:
  the board outline again, w10

## Text inside footprints (layer, text, board x,y; h text height)
C2: Top Overlay "+" at 1170,2015 h19.68
C5: Top Overlay "+" at 725,1515 h19.68 r180
C6: Top Overlay "+" at 955,1545 h19.68
C11: Top Overlay "+" at 1060,115 h19.68 r180
C12: Top Overlay "+" at 865,105 h19.68 r270